# Altium PCB ESP32_DEV.PcbDoc
Units mil, origin at the board's own origin, x right, y up, seen from the top; angles counter-clockwise.
Board outline 1811.02 x 1338.58 mil, 2 copper layers (Top Layer, Bottom Layer); 85 components, 68 nets, 382 pads, 184 vias.
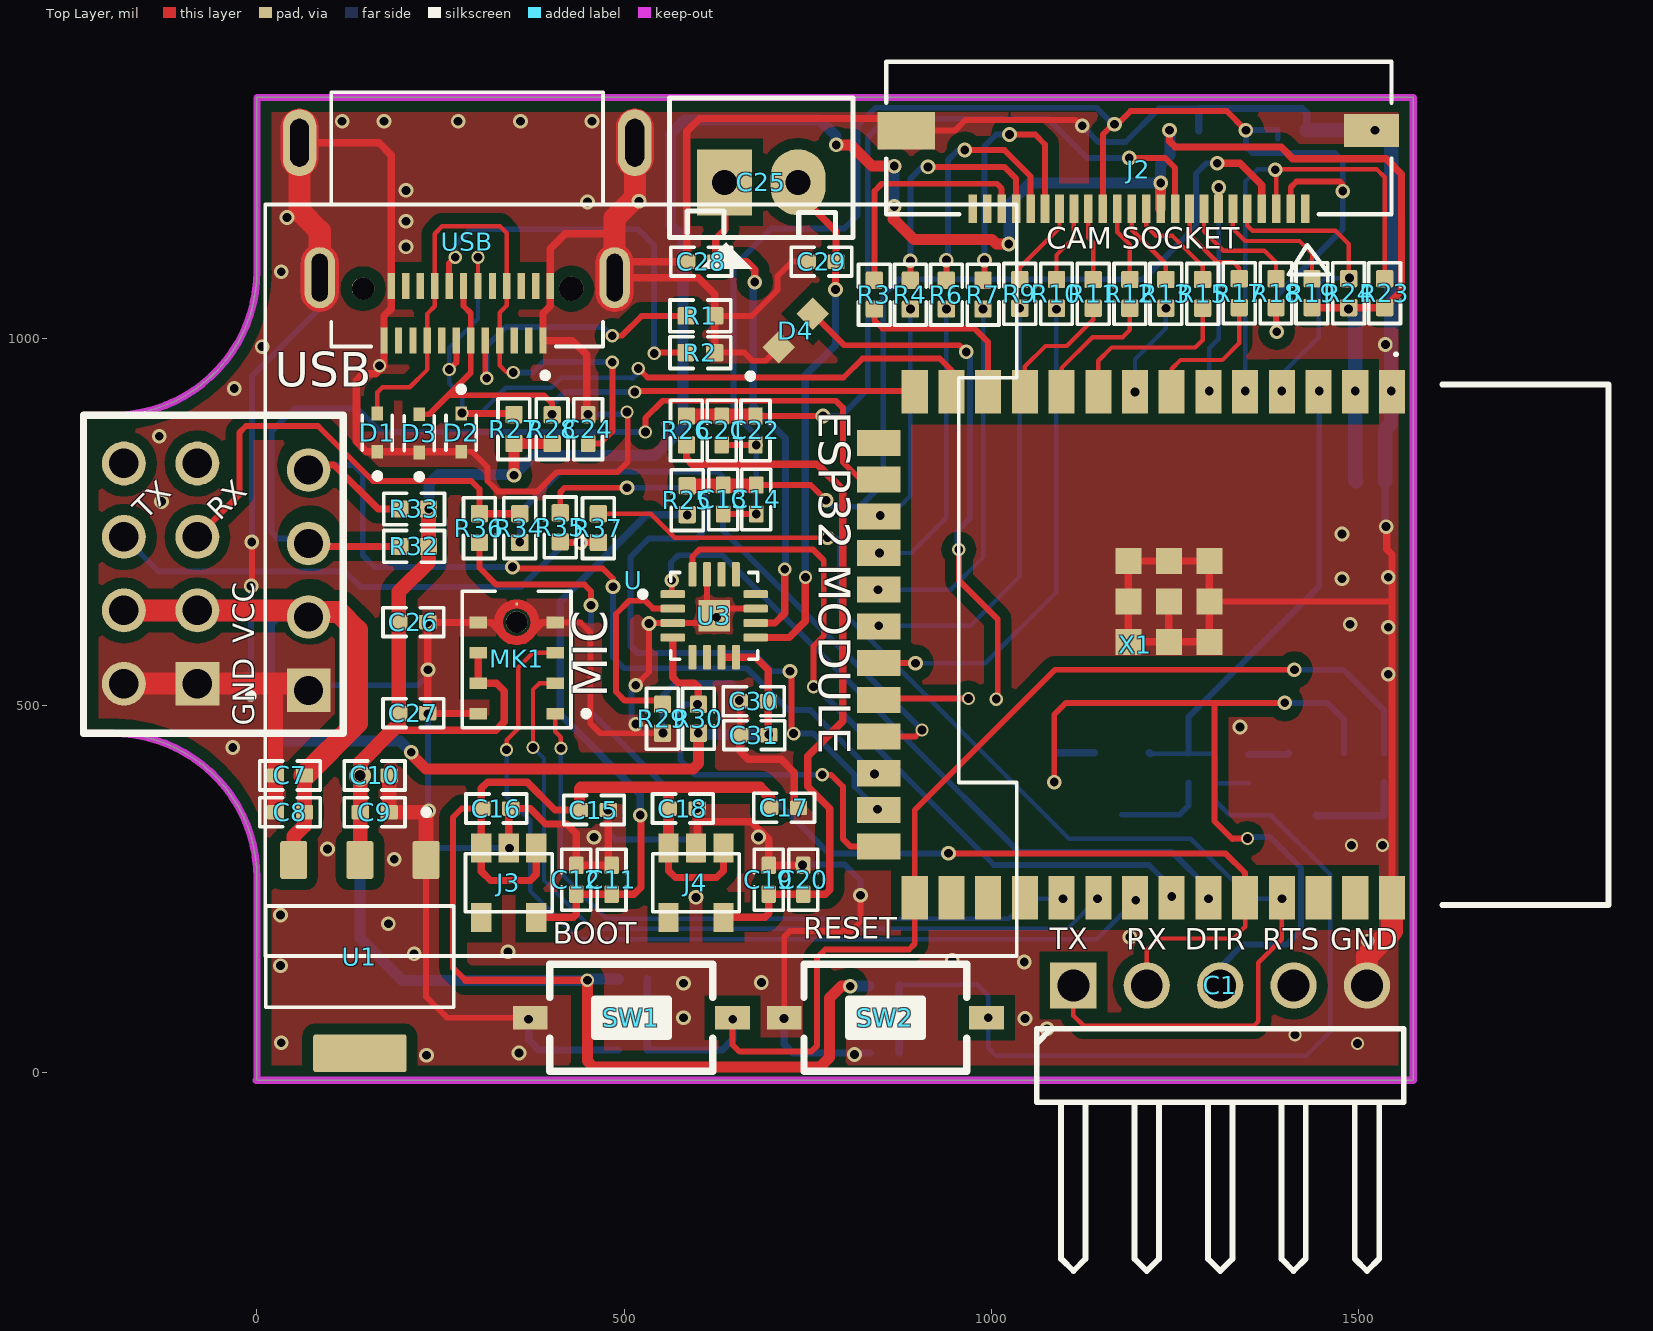
[diagram p0: Top Layer view]
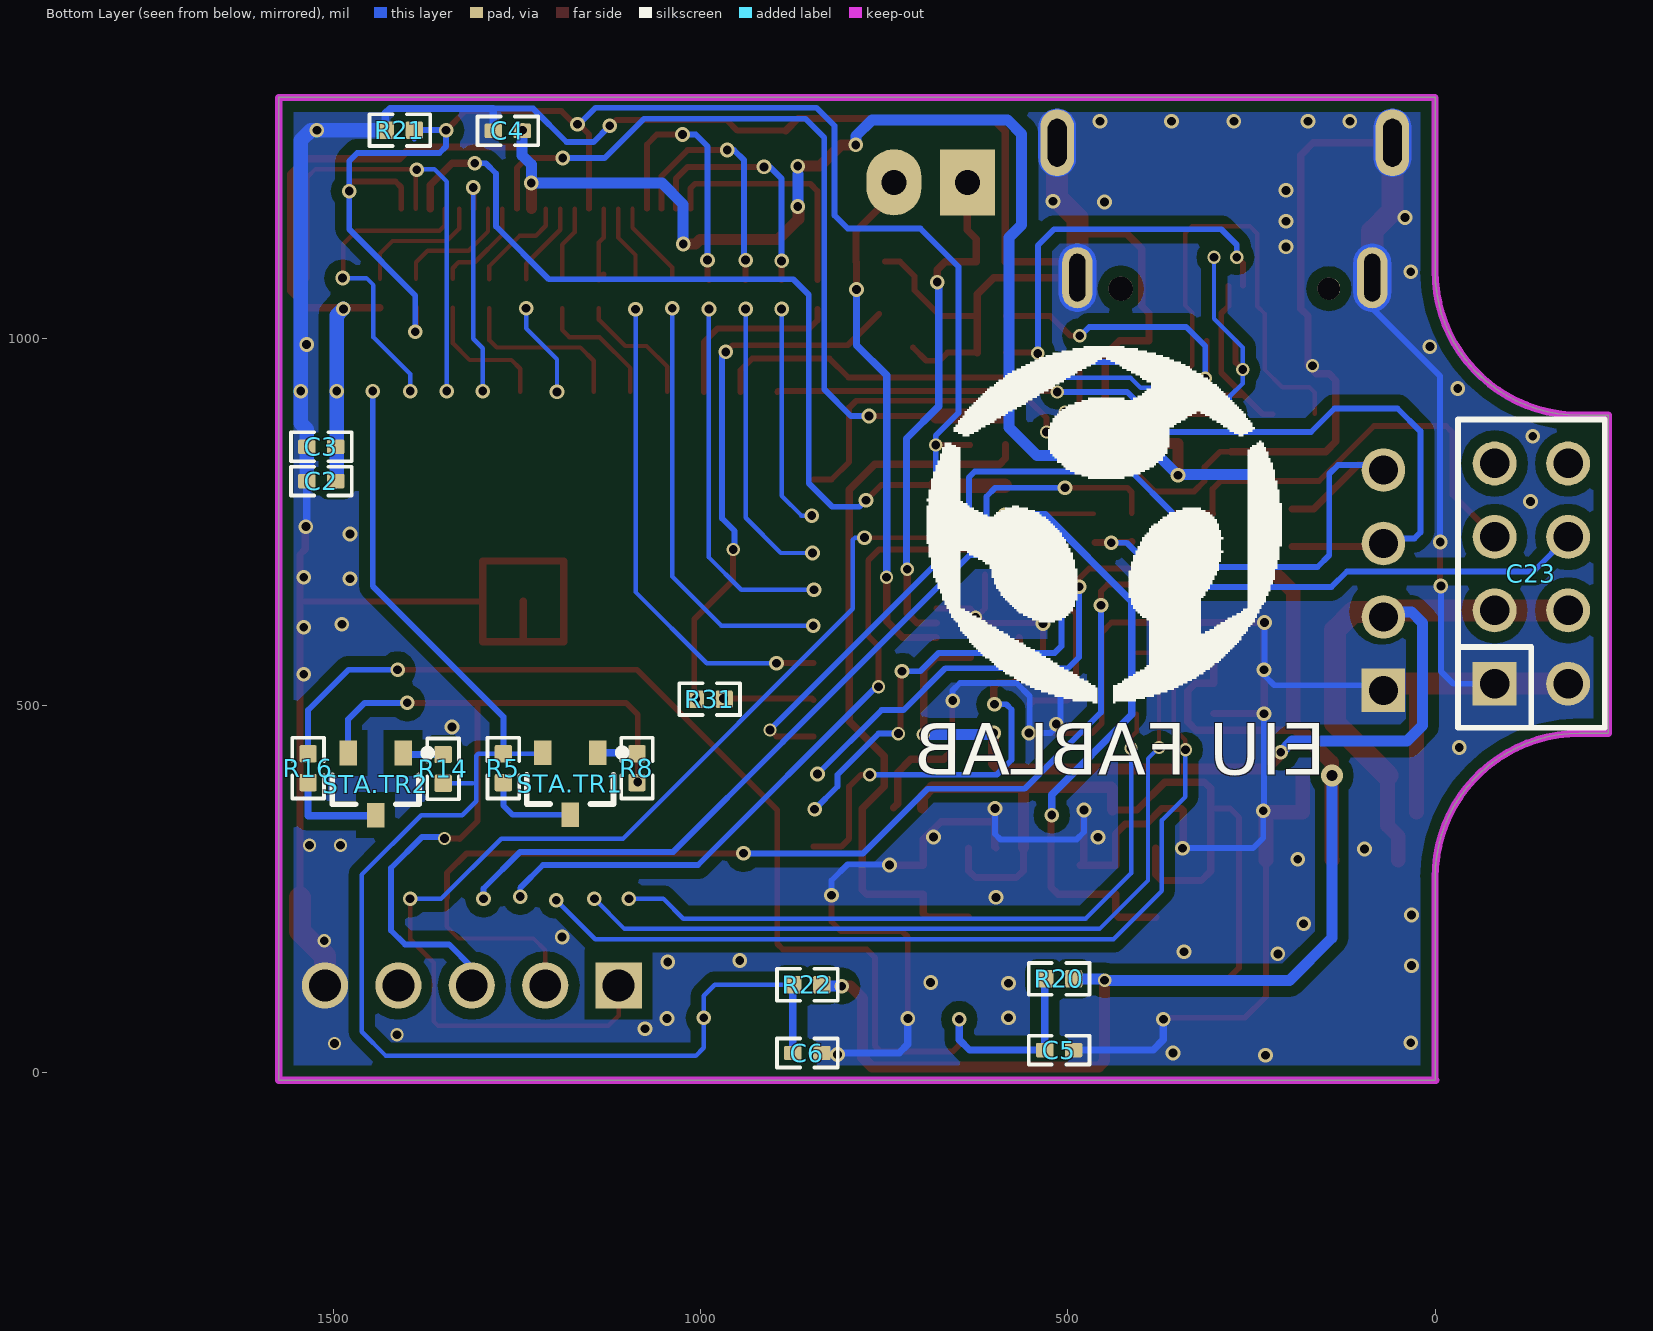
[diagram p1: Bottom Layer view, seen from below]
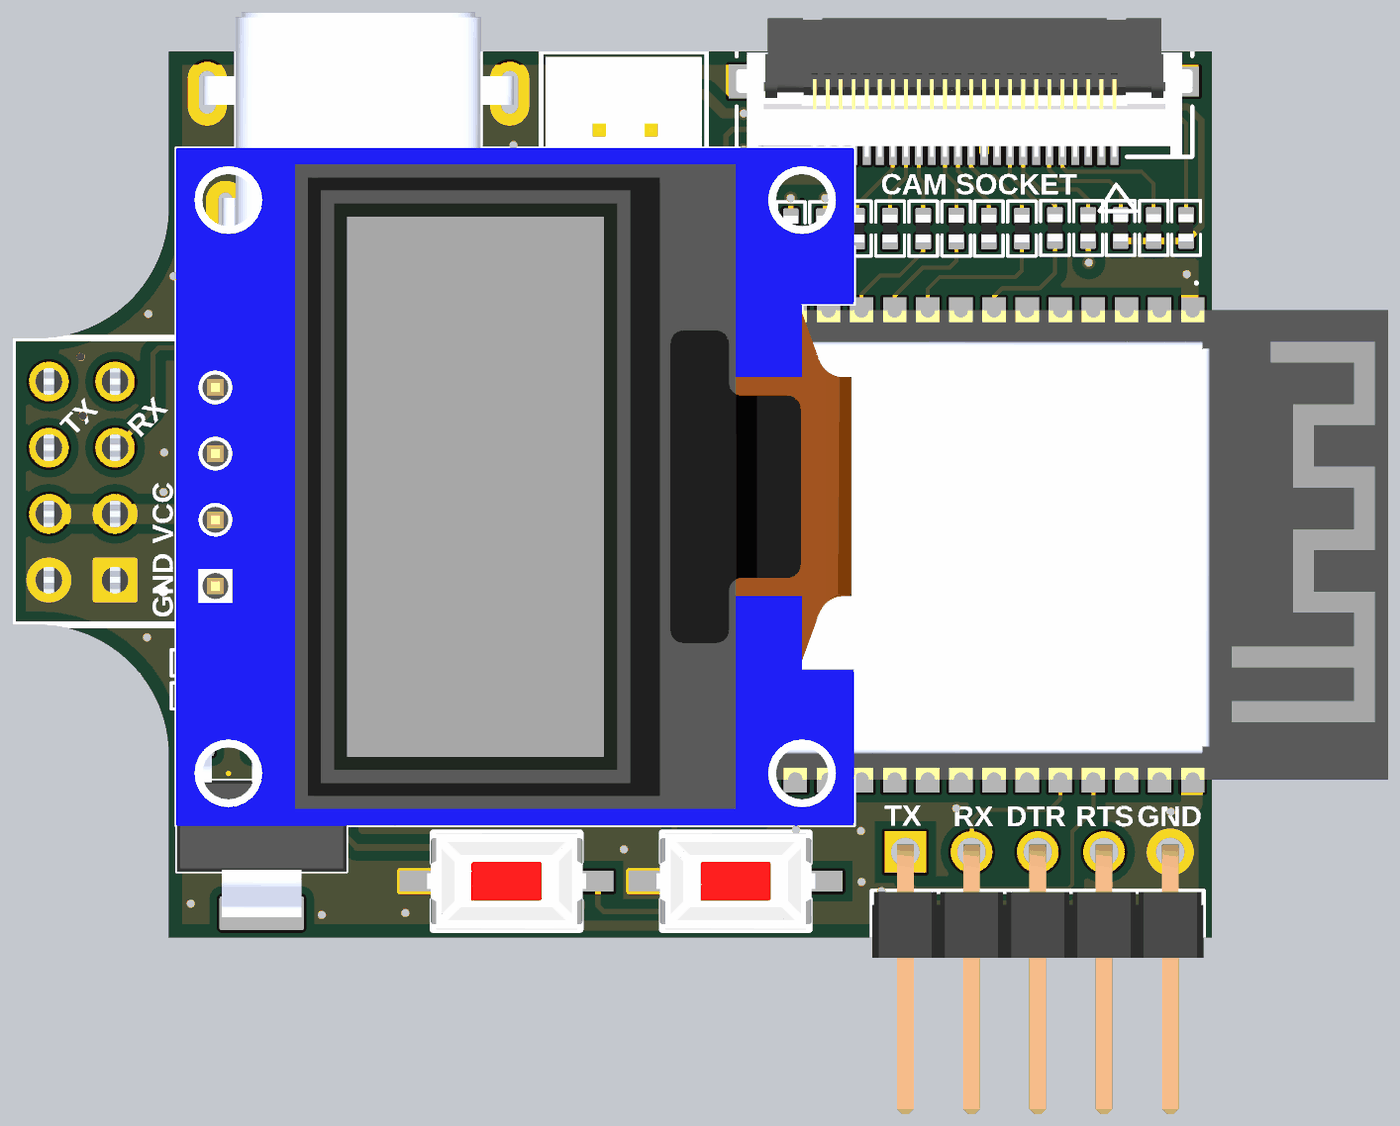
[diagram p2: 3D render of the assembled board from above, using the file's embedded part models]
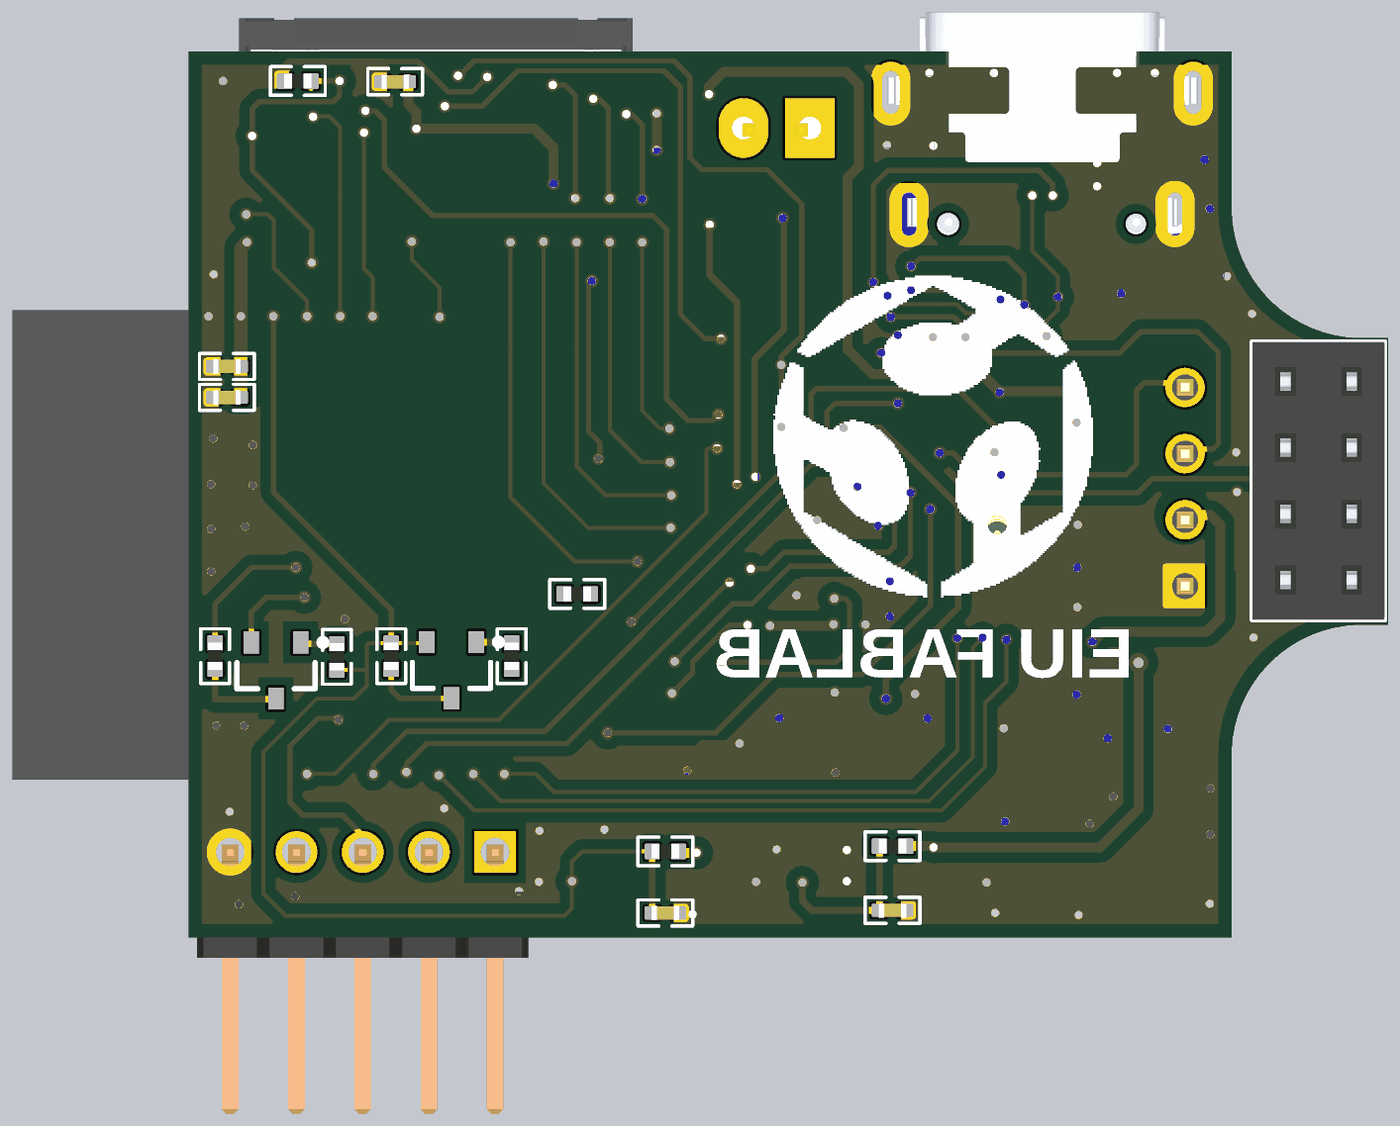
[diagram p3: 3D render of the assembled board from below, using the file's embedded part models]

## Layer stack, top to bottom
Top Solder: solder mask 0.4, Solder Resist, Dk 3.5
Top Layer: signal copper 1.4
Dielectric 1: dielectric 12.6, FR-4, Dk 4.8
Bottom Layer: signal copper 1.4
Bottom Solder: solder mask 0.4, Solder Resist, Dk 3.5

## Board outline
-236.22,462.44 -236.22,895.51 -196.85,895.51 ccw(c-196.85,1092.36) 0,1092.36 0,1328.58 1574.8,1328.58 1574.8,-10 0,-10 0,265.59 ccw(c-196.85,265.59) -196.85,462.44

## Design rules (kind name [scope] priority, off if disabled: settings)
Clearance [All] p1: gap=5 ignorepadtopadclearanceinfootprint=TRUE
PlaneConnect [All] p1: planeconnectstyle=Direct reliefexpansion=20 reliefentries=4 reliefconductorwidth=10 reliefairgap=10
PolygonConnect [All] p1: connectstyle=Direct reliefconductorwidth=10 reliefentries=4 polygonreliefangle="90 Angle" airgapwidth=10
RoutingVias [All] p1: holewidth=12 width=20 viastyle="Through Hole" minholewidth=12 minwidth=20 maxholewidth=12 maxwidth=20
SolderMaskExpansion [All] p1: expansion=4
Width [All] p1: maxlimit=30 minlimit=8 preferedwidth=10
29 further rules are at their usual default settings.

## Components (designator, comment, footprint, x,y, rotation, side; value= is the part's Value field where it differs from the comment)
C1 "JP5" JP5-D1C 1562,19 r0 top
C2 "22uF" CAPC1005X55N 1517,806 r180 bottom
C3 "100nF" CAPC1005X55N 1517,852.68 r180 bottom
C4 "0.1uF" CAPC1005X55N 1263,1283 r180 bottom
C5 "100nF" CAPC1005X55N 512,31 r0 bottom
C6 "100nF" CAPC1005X55N 855,27 r0 bottom
C7 "4.7uF" CAPC1005X55N 45,405 r0 top
C8 "1uF" CAPC1005X55N 45,355 r0 top
C9 "4.7uF" CAPC1005X55N 160.31,355 r180 top
C10 "1uF" CAPC1005X55N 160.31,405 r180 top
C11 "0.1uF" CAPC1005X55N 483,263 r270 top
C12 "10uF" CAPC1005X55N 435,263 r270 top
C13 "4.7uF" CAPC1005X55N 635,781 r90 top
C14 "0.1uF" CAPC1005X55N 680,781 r90 top
C15 "10uF" CAPC1005X55N 459,358 r180 top
C16 "0.1uF" CAPC1005X55N 326,360 r180 top
C17 "10uF" CAPC1005X55N 718,361 r180 top
C18 "0.1uF" CAPC1005X55N 580,360 r180 top
C19 "0.1uF" CAPC1005X55N 697,263 r270 top
C20 "10uF" CAPC1005X55N 744,263 r270 top
C21 "4.7uF" CAPC1005X55N 633,875 r90 top
C22 "0.1uF" CAPC1005X55N 679,875 r90 top
C23 "JP4x2" JP4-C2T -131.22,680 r90 bottom
C24 "22uF" CAPC1005X55N 451,876.8 r270 top
C25 "Header2" Header2 637,1213 r0 top
C26 "100nF" CAPC1005X55N 213,614 r0 top
C27 "10uF" CAPC1005X55N 213,490 r0 top
C28 "220pF" CAPC1005X55N 605,1105 r180 top
C29 "220pF" CAPC1005X55N 769,1105 r0 top
C30 "100nF" CAPC1005X55N 676.63,506 r0 top
C31 "10uF" CAPC1005X55N 677.31,460 r0 top
D1 "LESD5D5.0CT1G" TVS_LESD5D5.0CT1G 164,872 r90 top
D2 "LESD5D5.0CT1G" TVS_LESD5D5.0CT1G 278,872 r270 top
D3 "LESD5D5.0CT1G" TVS_LESD5D5.0CT1G 221,871 r90 top
D4 "KP-1608SURCK" LED_KP-1608SURCK 734,1011 r45 top
J2 "5051102491" CON_5051102491_MOL 1201.36,1273.46 r180 top
J3 "ME6211C28M5G-N-2.8V" SOT25 341,255 r180 top
J4 "ME6211C15M5G-N-1.5v" SOT25 596,255 r180 top
MK1 "INMP441ACEZ-R7" MIC_INMP441ACEZ-R7 353.78,563 r270 top
R1 "Thick Film" RESC1005X40N 604,1031 r180 top value=5.1K
R2 "Thick Film" RESC1005X40N 604,981 r180 top value=5.1K
R3 "Thick Film" RESC1005X40N 841,1060 r90 top value=100
R4 "Thick Film" RESC1005X40N 890,1060 r90 top value=100
R5 "Thick Film" RESC1005X40N 1269,415 r270 bottom value=10K
R6 "Thick Film" RESC1005X40N 939,1060 r90 top value=100
R7 "Thick Film" RESC1005X40N 989,1060 r90 top value=100
R8 "Thick Film" RESC1005X40N 1087,415 r270 bottom value=10K
R9 "Thick Film" RESC1005X40N 1039,1061 r90 top value=100
R10 "Thick Film" RESC1005X40N 1089,1061 r90 top value=100
R11 "Thick Film" RESC1005X40N 1139,1061 r90 top value=100
R12 "Thick Film" RESC1005X40N 1189,1061 r90 top value=100
R13 "Thick Film" RESC1005X40N 1238,1061 r90 top value=100
R14 "Thick Film" RESC1005X40N 1351,414 r270 bottom value=10K
R15 "Thick Film" RESC1005X40N 1288,1061 r90 top value=100
R16 "Thick Film" RESC1005X40N 1535,415 r270 bottom value=10K
R17 "Thick Film" RESC1005X40N 1338,1062 r90 top value=100
R18 "Thick Film" RESC1005X40N 1388,1062 r90 top value=100K
R19 "Thick Film" RESC1005X40N 1437,1062 r90 top value=10K
R20 "Thick Film" RESC1005X40N 512,128 r0 bottom value=120
R21 "Thick Film" RESC1005X40N 1410,1284 r0 bottom value=0
R22 "Thick Film" RESC1005X40N 855,120 r0 bottom value=120
R23 "Thick Film" RESC1005X40N 1536,1062 r270 top value=4.7K
R24 "Thick Film" RESC1005X40N 1487,1062 r270 top value=4.7K
R25 "Thick Film" RESC1005X40N 586,780 r270 top value=0
R26 "Thick Film" RESC1005X40N 585,875 r270 top value=0
R27 "Thick Film" RESC1005X40N 350,876.8 r90 top value=10K
R28 "Thick Film" RESC1005X40N 402,876.8 r270 top value=10K
R29 "Thick Film" RESC1005X40N 552.31,482.32 r270 top value=10K
R30 "Thick Film" RESC1005X40N 601.31,482.32 r270 top value=10K
R31 "Thick Film" RESC1005X40N 988,509 r180 bottom value=1K
R32 "Thick Film" RESC1005X40N 214,717 r180 top value=4.7K
R33 "Thick Film" RESC1005X40N 214,768 r0 top value=4.7K
R34 "Thick Film" RESC1005X40N 358,742 r270 top value=0
R35 "Thick Film" RESC1005X40N 413,743 r90 top value=0
R36 "Thick Film" RESC1005X40N 303,742 r270 top value=0
R37 "Thick Film" RESC1005X40N 465,742 r90 top value=0
STA.TR1 "TR815" SOT-23B_L 1178,393.88 r270 bottom value=C1815
STA.TR2 "TR815" SOT-23B_L 1443,393.32 r270 bottom value=C1815
SW1 "BOOT" SW1-SMD 510,75 r180 top value="SW chip 2 pin"
SW2 "RESET" SW1-SMD 856,75 r180 top value="SW chip 2 pin"
U "DM-OLED096-636" MODULE_DM-OLED096-636 523,671 r90 top
U1 "AMS1117-3.3" SOT229P700X180-4N 140.16,158.31 r270 top
U3 "MAX98357AETE+T" QFN50P300X300X80-17N 622.84,622.5 r0 top
USB "2388749-1" TE_2388749-1 286.29,1068.06 r180 top
X1 "ESP32-S3-WROOM-1-N16R8" ESP32S3WROOM1N8R2 1338.85,583.06 r270 top

## Footprints (in the part's own frame and the unit in brackets; to place one, negate y for a bottom-side part, rotate by r counter-clockwise, add the part's x,y. Pads: shape width x height; smd on the part's side, far side on the other; paste and mask are expansions set on the pad)
CAPC1005X55N [mm] "Chip Capacitor, Body 1.0x0.5mm, EIA 0402, IPC Medium Density"
  round 0.2 on Mech15: 0(0,0)
  rrect20% 0.6x0.5 smd: 1(-0.5,0) 2(0.5,0)
  Top Layer pour cut-out: -0.325,0.375 -0.2,0.5 0.2,0.5 0.325,0.375 0.325,-0.375 0.2,-0.5 -0.2,-0.5 -0.325,-0.375
  silkscreen extent -1.05,-0.5 1.05,0.5, body extent -0.52,-0.27 0.53,0.28, height 0.55
CON_5051102491_MOL [mm]
  rect 0.3x1 smd: 1(-5.75,2.45) 2(-5.25,2.45) 3(-4.75,2.45) 4(-4.25,2.45) 5(-3.75,2.45) 6(-3.25,2.45) 7(-2.75,2.45) 8(-2.25,2.45) 9(-1.75,2.45) 10(-1.25,2.45) 11(-0.75,2.45) 12(-0.25,2.45) 13(0.25,2.45) 14(0.75,2.45) 15(1.25,2.45) 16(1.75,2.45) 17(2.25,2.45) 18(2.75,2.45) 19(3.25,2.45) 20(3.75,2.45) 21(4.25,2.45) 22(4.75,2.45) 23(5.25,2.45) 24(5.75,2.45)
  rect 1.905x1.143 smd: P1(-8.05,-0.25)
  rect 2x1.3 smd: P2(8.05,-0.25)
  silkscreen extent -8.74,-2.64 8.74,4.72, body extent -8.75,-2.67 8.75,2.63, height 2.1
ESP32S3WROOM1N8R2 [mm]
  rect 1.5x0.9 smd: 1(-8.75,5.26) 2(-8.75,3.99) 3(-8.75,2.72) 4(-8.75,1.45) 5(-8.75,0.18) 6(-8.75,-1.09) 7(-8.75,-2.36) 8(-8.75,-3.63) 9(-8.75,-4.9) 10(-8.75,-6.17) 11(-8.75,-7.44) 12(-8.75,-8.71) 13(-8.75,-9.98) 14(-8.75,-11.25) 27(8.75,-11.25) 28(8.75,-9.98) 29(8.75,-8.71) 30(8.75,-7.44) 31(8.75,-6.17) 32(8.75,-4.9) 33(8.75,-3.63) 34(8.75,-2.36) 35(8.75,-1.09) 36(8.75,0.18) 37(8.75,1.45) 38(8.75,2.72) 39(8.75,3.99) 40(8.75,5.26)
  rect 0.9x1.5 smd: 15(-6.985,-12.5) 16(-5.715,-12.5) 17(-4.445,-12.5) 18(-3.175,-12.5) 19(-1.905,-12.5) 20(-0.635,-12.5) 21(0.635,-12.5) 22(1.905,-12.5) 23(3.175,-12.5) 24(4.445,-12.5) 25(5.715,-12.5) 26(6.985,-12.5)
  rect 0.9x0.9 smd: 41(-1.5,-2.46) 42(-1.5,-1.06) 43(-2.9,-1.06) 44(-2.9,-2.46) 45(-2.9,-3.86) 46(-1.5,-3.86) 47(-0.1,-3.86) 48(-0.1,-2.46) 49(-0.1,-1.06)
  silkscreen extent -10.1,5.35 9,12.75, body extent -9,-12.75 9,12.75, height 3.25
Header2 [mil] "CON2"
  rect 75x90 hole 34: 1(0,0)
  oval 75x90 hole 34: 2(100,0)
  silkscreen extent -75,-118 175,115, body extent -68,-70 168,107, height 236
JP4-C2T [mm] "8 pins, dual row, straight, gold plating"
  rect 1.52x1.52 hole 1.02: 1(-3.81,1.27)
  round 1.52 hole 1.02: 2(-1.27,1.27) 3(1.27,1.27) 4(3.81,1.27) 5(3.81,-1.27) 6(1.27,-1.27) 7(-1.27,-1.27) 8(-3.81,-1.27)
  silkscreen extent -5.33,-2.54 5.33,2.54, body extent -5.33,-2.54 5.33,2.54, height 8.51
JP5-D1C [mm] "5 pins, 1 row, right angled, gold plating"
  rect 1.6x1.6 hole 1.1: 1(-11.43,2.54)
  round 1.6 hole 1.1: 2(-8.89,2.54) 3(-6.35,2.54) 4(-3.81,2.54) 5(-1.27,2.54)
  silkscreen extent -12.7,-7.34 0,1.04, body extent -12.7,-7.52 0,2.84, height 2.55
LED_KP-1608SURCK [mm]
  rect 0.8x0.8 smd: 1(0.825,0) 2(-0.825,0)
  silkscreen extent -2.32,-0.1 -2.13,0.1, body extent -0.8,-0.4 0.8,0.4, height 1.1
MIC_INMP441ACEZ-R7 [mm]
  rect 0.4x0.6 smd paste-0.025: 1(1.87,1.33) 2(0.82,1.33) 3(-0.23,1.33) 4(-1.28,1.33) 6(-1.28,-1.33) 7(-0.23,-1.33) 8(0.82,-1.33) 9(1.87,-1.33)
  rect 0.1x0.1 smd paste-1 mask+0: 5(-1.92,0)
  round 0.75 hole 0.75 unplated mask+0.505: ""(-1.29,0)
  Top Layer region: 244 vertices and 0 holes, not listed, extent -2.07,-0.78 -0.51,0.78
  silkscreen extent -2.36,-1.88 2.36,2.5, body extent -2.36,-1.88 2.36,1.88, height 1.05
MODULE_DM-OLED096-636 [mm]
  rect 1.508x1.508 / inner round 1.508 / far side rect 1.508x1.508 hole 1: 1(-3.81,11.5)
  round 1.508 hole 1: 2(-1.27,11.5) 3(1.27,11.5) 4(3.81,11.5)
  round 0 smd: S1(-11,11) S2(11,11) S3(11,-11) S4(-11,-11)
  silkscreen extent -13,-13 13,13.6, body extent -13,-13 13,13, height 8.96
QFN50P300X300X80-17N [mm]
  rrect25% 0.84x0.27 smd: 1(-1.435,0.75) 2(-1.435,0.25) 3(-1.435,-0.25) 4(-1.435,-0.75) 9(1.435,-0.75) 10(1.435,-0.25) 11(1.435,0.25) 12(1.435,0.75)
  rrect25% 0.27x0.84 smd: 5(-0.75,-1.435) 6(-0.25,-1.435) 7(0.25,-1.435) 8(0.75,-1.435) 13(0.75,1.435) 14(0.25,1.435) 15(-0.25,1.435) 16(-0.75,1.435)
  rect 1.1x1.1 smd paste-0.2: 17(0,0)
  silkscreen extent -2.57,-1.5 1.5,1.5, body extent -1.5,-1.5 1.5,1.5, height 0.9
RESC1005X40N [mm] "Chip Resistor, Body 1.0x0.5mm, EIA 0402, IPC Medium Density"
  round 0.2 on Mech15: 0(0,0)
  rrect20% 0.6x0.6 smd: 1(-0.5,0) 2(0.5,0)
  Top Layer pour cut-out: -0.325,0.375 -0.2,0.5 0.2,0.5 0.325,0.375 0.325,-0.375 0.2,-0.5 -0.2,-0.5 -0.325,-0.375
  silkscreen extent -1.05,-0.55 1.05,0.55, body extent -0.52,-0.27 0.53,0.28, height 0.4
SOT25 [mm]
  rect 0.7x1 smd: P$1(-1,-1.3) P$2(-0.05,-1.3) P$3(0.9,-1.3) P$4(-1,1.1) P$5(0.9,1.1)
  silkscreen extent -1.55,-1.1 1.45,0.9, body extent -1.45,-1.4 1.45,1.4, height 1.3
SOT229P700X180-4N [mm]
  rrect15% 1.31x0.93 smd: 1(-3.345,2.29) 2(-3.345,0) 3(-3.345,-2.29)
  rrect15% 1.31x3.24 smd: 4(3.345,0)
  silkscreen extent -5.1,-3.25 1.75,3.25, body extent -3.5,-3.25 3.5,3.25, height 1.8
SOT-23B_L [mm] "SOT23, 3-Leads, Body 2.9x1.3mm, Pitch 0.95mm, Lead Span 2.4mm, IPC High Density"
  rect 0.85x0.6 smd: 1(-1.075,-0.95) 2(1.075,0) 3(-1.075,0.95)
  silkscreen extent -1.2,-1.5 0.7,1.92, body extent -0.7,-1.5 0.7,1.5, height 1.14
SW1-SMD [mm]
  rect 1.2x0.8 smd: 1(-3.5,0) 2(3.5,0)
  silkscreen extent -2.82,-1.85 2.82,1.85, body extent -3.05,-1.85 3.05,1.85, height 2.5
TE_2388749-1 [mm]
  rect 0.254x0.9 smd: A1(-2.625,1.8) A2(-2.125,1.8) A3(-1.625,1.8) A4(-1.125,1.8) A5(-0.625,1.8) A6(-0.125,1.8) A7(0.375,1.8) A8(0.875,1.8) A9(1.375,1.8) A10(1.875,1.8) A11(2.375,1.8) A12(2.875,1.8) B1(2.625,-0.1) B2(2.125,-0.1) B3(1.625,-0.1) B4(1.125,-0.1) B5(0.625,-0.1) B6(0.125,-0.1) B7(-0.375,-0.1) B8(-0.875,-0.1) B9(-1.375,-0.1) B10(-1.875,-0.1) B11(-2.375,-0.1) B12(-2.875,-0.1)
  oval 1.058x2.116 hole 0.55 slot 1.65 at 90 deg mask+0: S1(-5.1,-0.38) S2(5.1,-0.38)
  oval 1.158x2.316 hole 0.65 slot 1.65 at 90 deg mask+0: S3(-5.8,-5.05) S4(5.8,-5.05)
  round 0.84 hole 0.84 unplated: ""(-3.6,0)
  round 0.78 hole 0.78 unplated: ""(3.6,0)
  Top Layer region: 5.868,-3.879 5.935,-3.889 6.001,-3.907 6.064,-3.931 6.125,-3.962 6.182,-3.999 6.235,-4.042 6.283,-4.09 6.326,-4.143 6.363,-4.2 6.394,-4.261 6.418,-4.324 6.436,-4.39 6.446,-4.457 6.45,-4.525 6.45,-5.575 6.446,-5.643 6.436,-5.71 6.418,-5.776 6.394,-5.839 6.363,-5.9 6.326,-5.957 6.283,-6.01 6.235,-6.058 6.182,-6.101 6.125,-6.138 6.064,-6.169 6.001,-6.193 5.935,-6.211 5.868,-6.221 5.8,-6.225 5.732,-6.221 5.665,-6.211 5.599,-6.193 5.536,-6.169 5.475,-6.138 5.418,-6.101 5.365,-6.058 5.317,-6.01 5.274,-5.957 5.237,-5.9 5.206,-5.839 5.182,-5.776 5.164,-5.71 5.154,-5.643 5.15,-5.575 5.15,-4.525 5.154,-4.457 5.164,-4.39 5.182,-4.324 5.206,-4.261 5.237,-4.2 5.274,-4.143 5.317,-4.09 5.365,-4.042 5.418,-3.999 5.475,-3.962 5.536,-3.931 5.599,-3.907 5.665,-3.889 5.732,-3.879 5.8,-3.875
  Top Layer region: -5.732,-3.879 -5.665,-3.889 -5.599,-3.907 -5.536,-3.931 -5.475,-3.962 -5.418,-3.999 -5.365,-4.042 -5.317,-4.09 -5.274,-4.143 -5.237,-4.2 -5.206,-4.261 -5.182,-4.324 -5.164,-4.39 -5.154,-4.457 -5.15,-4.525 -5.15,-5.575 -5.154,-5.643 -5.164,-5.71 -5.182,-5.776 -5.206,-5.839 -5.237,-5.9 -5.274,-5.957 -5.317,-6.01 -5.365,-6.058 -5.418,-6.101 -5.475,-6.138 -5.536,-6.169 -5.599,-6.193 -5.665,-6.211 -5.732,-6.221 -5.8,-6.225 -5.868,-6.221 -5.935,-6.211 -6.001,-6.193 -6.064,-6.169 -6.125,-6.138 -6.182,-6.101 -6.235,-6.058 -6.283,-6.01 -6.326,-5.957 -6.363,-5.9 -6.394,-5.839 -6.418,-5.776 -6.436,-5.71 -6.446,-5.643 -6.45,-5.575 -6.45,-4.525 -6.446,-4.457 -6.436,-4.39 -6.418,-4.324 -6.394,-4.261 -6.363,-4.2 -6.326,-4.143 -6.283,-4.09 -6.235,-4.042 -6.182,-3.999 -6.125,-3.962 -6.064,-3.931 -6.001,-3.907 -5.935,-3.889 -5.868,-3.879 -5.8,-3.875
  Top Layer region: 5.168,0.791 5.235,0.781 5.301,0.763 5.364,0.739 5.425,0.708 5.482,0.671 5.535,0.628 5.583,0.58 5.626,0.527 5.663,0.47 5.694,0.409 5.718,0.346 5.736,0.28 5.746,0.213 5.75,0.145 5.75,-0.905 5.746,-0.973 5.736,-1.04 5.718,-1.106 5.694,-1.169 5.663,-1.23 5.626,-1.287 5.583,-1.34 5.535,-1.388 5.482,-1.431 5.425,-1.468 5.364,-1.499 5.301,-1.523 5.235,-1.541 5.168,-1.551 5.1,-1.555 5.032,-1.551 4.965,-1.541 4.899,-1.523 4.836,-1.499 4.775,-1.468 4.718,-1.431 4.665,-1.388 4.617,-1.34 4.574,-1.287 4.537,-1.23 4.506,-1.169 4.482,-1.106 4.464,-1.04 4.454,-0.973 4.45,-0.905 4.45,0.145 4.454,0.213 4.464,0.28 4.482,0.346 4.506,0.409 4.537,0.47 4.574,0.527 4.617,0.58 4.665,0.628 4.718,0.671 4.775,0.708 4.836,0.739 4.899,0.763 4.965,0.781 5.032,0.791 5.1,0.795
  Top Layer region: -5.032,0.791 -4.965,0.781 -4.899,0.763 -4.836,0.739 -4.775,0.708 -4.718,0.671 -4.665,0.628 -4.617,0.58 -4.574,0.527 -4.537,0.47 -4.506,0.409 -4.482,0.346 -4.464,0.28 -4.454,0.213 -4.45,0.145 -4.45,-0.905 -4.454,-0.973 -4.464,-1.04 -4.482,-1.106 -4.506,-1.169 -4.537,-1.23 -4.574,-1.287 -4.617,-1.34 -4.665,-1.388 -4.718,-1.431 -4.775,-1.468 -4.836,-1.499 -4.899,-1.523 -4.965,-1.541 -5.032,-1.551 -5.1,-1.555 -5.168,-1.551 -5.235,-1.541 -5.301,-1.523 -5.364,-1.499 -5.425,-1.468 -5.482,-1.431 -5.535,-1.388 -5.583,-1.34 -5.626,-1.287 -5.663,-1.23 -5.694,-1.169 -5.718,-1.106 -5.736,-1.04 -5.746,-0.973 -5.75,-0.905 -5.75,0.145 -5.746,0.213 -5.736,0.28 -5.718,0.346 -5.694,0.409 -5.663,0.47 -5.626,0.527 -5.583,0.58 -5.535,0.628 -5.482,0.671 -5.425,0.708 -5.364,0.739 -5.301,0.763 -5.235,0.781 -5.168,0.791 -5.1,0.795
  Bottom Layer region: 5.868,-3.879 5.935,-3.889 6.001,-3.907 6.064,-3.931 6.125,-3.962 6.182,-3.999 6.235,-4.042 6.283,-4.09 6.326,-4.143 6.363,-4.2 6.394,-4.261 6.418,-4.324 6.436,-4.39 6.446,-4.457 6.45,-4.525 6.45,-5.575 6.446,-5.643 6.436,-5.71 6.418,-5.776 6.394,-5.839 6.363,-5.9 6.326,-5.957 6.283,-6.01 6.235,-6.058 6.182,-6.101 6.125,-6.138 6.064,-6.169 6.001,-6.193 5.935,-6.211 5.868,-6.221 5.8,-6.225 5.732,-6.221 5.665,-6.211 5.599,-6.193 5.536,-6.169 5.475,-6.138 5.418,-6.101 5.365,-6.058 5.317,-6.01 5.274,-5.957 5.237,-5.9 5.206,-5.839 5.182,-5.776 5.164,-5.71 5.154,-5.643 5.15,-5.575 5.15,-4.525 5.154,-4.457 5.164,-4.39 5.182,-4.324 5.206,-4.261 5.237,-4.2 5.274,-4.143 5.317,-4.09 5.365,-4.042 5.418,-3.999 5.475,-3.962 5.536,-3.931 5.599,-3.907 5.665,-3.889 5.732,-3.879 5.8,-3.875
  Bottom Layer region: -5.732,-3.879 -5.665,-3.889 -5.599,-3.907 -5.536,-3.931 -5.475,-3.962 -5.418,-3.999 -5.365,-4.042 -5.317,-4.09 -5.274,-4.143 -5.237,-4.2 -5.206,-4.261 -5.182,-4.324 -5.164,-4.39 -5.154,-4.457 -5.15,-4.525 -5.15,-5.575 -5.154,-5.643 -5.164,-5.71 -5.182,-5.776 -5.206,-5.839 -5.237,-5.9 -5.274,-5.957 -5.317,-6.01 -5.365,-6.058 -5.418,-6.101 -5.475,-6.138 -5.536,-6.169 -5.599,-6.193 -5.665,-6.211 -5.732,-6.221 -5.8,-6.225 -5.868,-6.221 -5.935,-6.211 -6.001,-6.193 -6.064,-6.169 -6.125,-6.138 -6.182,-6.101 -6.235,-6.058 -6.283,-6.01 -6.326,-5.957 -6.363,-5.9 -6.394,-5.839 -6.418,-5.776 -6.436,-5.71 -6.446,-5.643 -6.45,-5.575 -6.45,-4.525 -6.446,-4.457 -6.436,-4.39 -6.418,-4.324 -6.394,-4.261 -6.363,-4.2 -6.326,-4.143 -6.283,-4.09 -6.235,-4.042 -6.182,-3.999 -6.125,-3.962 -6.064,-3.931 -6.001,-3.907 -5.935,-3.889 -5.868,-3.879 -5.8,-3.875
  Bottom Layer region: -5.032,0.791 -4.965,0.781 -4.899,0.763 -4.836,0.739 -4.775,0.708 -4.718,0.671 -4.665,0.628 -4.617,0.58 -4.574,0.527 -4.537,0.47 -4.506,0.409 -4.482,0.346 -4.464,0.28 -4.454,0.213 -4.45,0.145 -4.45,-0.905 -4.454,-0.973 -4.464,-1.04 -4.482,-1.106 -4.506,-1.169 -4.537,-1.23 -4.574,-1.287 -4.617,-1.34 -4.665,-1.388 -4.718,-1.431 -4.775,-1.468 -4.836,-1.499 -4.899,-1.523 -4.965,-1.541 -5.032,-1.551 -5.1,-1.555 -5.168,-1.551 -5.235,-1.541 -5.301,-1.523 -5.364,-1.499 -5.425,-1.468 -5.482,-1.431 -5.535,-1.388 -5.583,-1.34 -5.626,-1.287 -5.663,-1.23 -5.694,-1.169 -5.718,-1.106 -5.736,-1.04 -5.746,-0.973 -5.75,-0.905 -5.75,0.145 -5.746,0.213 -5.736,0.28 -5.718,0.346 -5.694,0.409 -5.663,0.47 -5.626,0.527 -5.583,0.58 -5.535,0.628 -5.482,0.671 -5.425,0.708 -5.364,0.739 -5.301,0.763 -5.235,0.781 -5.168,0.791 -5.1,0.795
  Bottom Layer region: 5.168,0.791 5.235,0.781 5.301,0.763 5.364,0.739 5.425,0.708 5.482,0.671 5.535,0.628 5.583,0.58 5.626,0.527 5.663,0.47 5.694,0.409 5.718,0.346 5.736,0.28 5.746,0.213 5.75,0.145 5.75,-0.905 5.746,-0.973 5.736,-1.04 5.718,-1.106 5.694,-1.169 5.663,-1.23 5.626,-1.287 5.583,-1.34 5.535,-1.388 5.482,-1.431 5.425,-1.468 5.364,-1.499 5.301,-1.523 5.235,-1.541 5.168,-1.551 5.1,-1.555 5.032,-1.551 4.965,-1.541 4.899,-1.523 4.836,-1.499 4.775,-1.468 4.718,-1.431 4.665,-1.388 4.617,-1.34 4.574,-1.287 4.537,-1.23 4.506,-1.169 4.482,-1.106 4.464,-1.04 4.454,-0.973 4.45,-0.905 4.45,0.145 4.454,0.213 4.464,0.28 4.482,0.346 4.506,0.409 4.537,0.47 4.574,0.527 4.617,0.58 4.665,0.628 4.718,0.671 4.775,0.708 4.836,0.739 4.899,0.763 4.965,0.781 5.032,0.791 5.1,0.795
  silkscreen extent -4.7,-6.8 4.7,3.1, body extent -5.93,-8.12 5.97,2.02, height 2.85
TVS_LESD5D5.0CT1G [mm]
  rect 0.48x0.4 smd: 1(-0.66,0) 2(0.66,0)
  silkscreen extent -1.6,-0.52 0.6,0.52, body extent -0.8,-0.4 0.8,0.4, height 0.7

## Part data
C1: "WR-PHD 2.54 mm Angled Socket Header", Manufacturer="W¨¹rth Elektronik eiSos GmbH", partNo=613005143121, ComponentLink1 Description=Manufacturer, ComponentLink1URL=http://www.we-online.com, ComponentLink2 Description=Datasheet, ComponentLink2URL=http://katalog.we-online.de/em/datasheet/6130xx143121.pdf, Created by="Karrer Zheng", Created Date="29 March 2013", NoPins=05
C2 C3 C4 C5 C6 C7 C8 C9 C10 C11 C12 C13 C14 C15 C16 C17 C18 C19 C20 C21 C22 C24 C26 C27 C28 C29 C30 C31: library part "CAP C_0402", "Capacitor SMD Cer 1nF 10% 16V X7R 0402", Manufacturer 1="AVX Corporation", Manufacturer 2=Yageo, Manufacturer Part Number 1=0402YC102KAT2A, Manufacturer Part Number 2=CC0402KRX7R7BB102, Operating Temperature="-55°C ~ 125°C", Package / Case="0402 (1005 Metric)", Ratings="16V; X7R", Supplier Part Number 1=478-6197-1-ND, Tolerance=±10%, ComponentLink1Description=http://www.avx.com/docs/Catalogs/cx7r.pdf, ComponentLink1URL=http://www.avx.com/docs/Catalogs/cx7r.pdf, ComponentLink2Description=http://www.yageo.com/documents/recent/UPY-GPHC_X7R_6.3V-to-50V_8.pdf, ComponentLink2URL=http://www.yageo.com/documents/recent/UPY-GPHC_X7R_6.3V-to-50V_8.pdf, SCDType=spec, Size / Dimension="0.039\" L x 0.020\" W (1.00mm x 0.50mm)", Supplier 1=Digi-Key, Supplier 2=Digi-Key, Supplier Part Number 2=311-1352-1-ND
C23: "WR-PHD 2.54 mm Dual Socket Header", Manufacturer="W¨¹rth Elektronik eiSos GmbH", partNo=61300821821, ComponentLink1 Description=Manufacturer, ComponentLink1URL=http://www.we-online.com, ComponentLink2 Description=Datasheet, ComponentLink2URL=http://katalog.we-online.de/em/datasheet/6130xx21821.pdf, Created by="Karrer Zheng", Created Date="29 March 2013", NoPins=08
C25: "Header IDC, 2 x 1 Pin Vertical 2.54mm Pitch (Non-Boxed, Male)", Manufacturer="W¨¹rth Elektronik eiSos GmbH", partNo=613002143121, ComponentLink1 Description=Manufacturer, ComponentLink1URL=http://www.we-online.com, ComponentLink2 Description=Datasheet, ComponentLink2URL=http://katalog.we-online.de/em/datasheet/6130xx143121.pdf, Created by="Karrer Zheng", Created Date="29 March 2013", NoPins=02
D1 D2 D3: "Transient Voltage Suppressors for ESD Protection", Package=None, Availability="Not in stock", Check_prices=https://www.snapeda.com/parts/LESD5D5.0CT1G/Leshan+Radio+Co./view-part/?ref=eda, MF="Leshan Radio Co.", MP=LESD5D5.0CT1G, Price=None, SnapEDA_Link=https://www.snapeda.com/parts/LESD5D5.0CT1G/Leshan+Radio+Co./view-part/?ref=snap
D4: "LED; SMD; 0603; red; 50-150mcd; 1.6x0.8mm; 120°; 20mA;", Package="0603 Kingbright", Check_prices=https://www.snapeda.com/parts/KP-1608SURCK/Kingbright/view-part/?ref=eda, MF=Kingbright, MP=KP-1608SURCK, SnapEDA_Link=https://www.snapeda.com/parts/KP-1608SURCK/Kingbright/view-part/?ref=snap
J2: "24 Position FFC, FPC Connector Contacts, Bottom 0.020 (0.50mm) Surface Mount, Right Angle", Package=None, Check_prices=https://www.snapeda.com/parts/5051102491/Molex/view-part/?ref=eda, MF=Molex, MP=5051102491, SnapEDA_Link=https://www.snapeda.com/parts/5051102491/Molex/view-part/?ref=snap
J3 J4: library part XC6222B281MR-G, "Linear Voltage Regulator IC Positive Fixed 1 Output 700mA SOT-25-5", Package="SOT-753 Torex", Check_prices=https://www.snapeda.com/parts/XC6222B281MR-G/Torex/view-part/?ref=eda, MF=Torex, MP=XC6222B281MR-G, SnapEDA_Link=https://www.snapeda.com/parts/XC6222B281MR-G/Torex/view-part/?ref=snap
MK1: "60 Hz ~ 15 kHz Digital, I2S Microphone MEMS (Silicon) 1.62 V ~ 3.63 V Omnidirectional (-26dB ±3dB @ 94dB SPL) Solder Pads", Package="LGA-9 TDK InvenSense", Check_prices=https://www.snapeda.com/parts/INMP441ACEZ-R7/TDK/view-part/?ref=eda, MF="TDK InvenSense", MP=INMP441ACEZ-R7, SnapEDA_Link=https://www.snapeda.com/parts/INMP441ACEZ-R7/TDK/view-part/?ref=snap
R1 R2 R3 R4 R5 R6 R7 R8 R9 R10 R11 R12 R13 R14 R15 R16 R17 R18 R19 R20 R21 R22 R23 R24 R25 R26 R27 R28 R29 R30 R31 R32 R33 R34 R35 R36 R37: library part RES_0402, "Resistor SMD chip 1k Ohm 0.063W 5% 0402", Manufacturer 1=Yageo, Manufacturer 2="Vishay Dale", Manufacturer 3="Samsung Electro-Mechanics America, Inc", Manufacturer 4="Rohm Semiconductor", Manufacturer 5="Panasonic Electronic Components", Manufacturer Part Number 1=RC0402JR-071KL, Manufacturer Part Number 2=CRCW04021K00JNED, Manufacturer Part Number 3=RC1005J102CS, Manufacturer Part Number 4=MCR01MRTJ102, Manufacturer Part Number 5=ERJ-2GEJ102X, Package / Case="0402 (1005 Metric)", Ratings="1/16 W", Supplier Part Number 1=311-1.0KJRCT-ND, Tolerance=±5%, ComponentLink1Description=http://www.yageo.com/documents/recent/PYu-RC0402_51_RoHS_L_6.pdf, ComponentLink1URL=http://www.yageo.com/documents/recent/PYu-RC0402_51_RoHS_L_6.pdf, ComponentLink2Description=http://www.vishay.com/doc?20035, ComponentLink2URL=http://www.vishay.com/doc?20035, ComponentLink3Description=http://www.samsungsem.com/servlet/FileDownload?filename=productcatalog/pdf/Chip_Resistor.pdf, ComponentLink3URL=http://www.samsungsem.com/servlet/FileDownload?filename=productcatalog/pdf/Chip_Resistor.pdf, ComponentLink4Description=http://rohmfs.rohm.com/en/products/databook/datasheet/passive/resistor/chip_resistor/mcr_g.pdf, ComponentLink4URL=http://rohmfs.rohm.com/en/products/databook/datasheet/passive/resistor/chip_resistor/mcr_g.pdf, ComponentLink5Description=http://industrial.panasonic.com/www-cgi/jvcr13pz.cgi?E+PZ+3+AOA0001+ERJ2GEJ102X+7+WW, ComponentLink5URL=http://industrial.panasonic.com/www-cgi/jvcr13pz.cgi?E+PZ+3+AOA0001+ERJ2GEJ102X+7+WW, RoHS 1="RoHS Compliant", RoHS 2="RoHS Compliant", RoHS 3="RoHS Compliant", RoHS 4="RoHS Compliant", RoHS 5="RoHS Compliant", SCDType=spec, Supplier 1=Digi-Key, Supplier 2=Digi-Key, Supplier 3=Digi-Key, Supplier 4=Digi-Key, Supplier 5=Digi-Key, Supplier Part Number 2=541-1.0KJCT-ND, Supplier Part Number 3=1276-4376-1-ND, Supplier Part Number 4=RHM1.0KCECT-ND, Supplier Part Number 5=P1.0KJCT-ND
STA.TR1 STA.TR2: library part C1815, "NPN 600mW, ECB", =C2383
SW1 SW2: library part SW2, "Switch button 2 pin"
U: "0.96” 128 X 64 MONOCHROME GRAPHIC OLED DISPLAY MODULE - I2C", Package=Package, Check_prices=https://www.snapeda.com/parts/DM-OLED096-636/Display+Module/view-part/?ref=eda, MF="Display Module", MP=DM-OLED096-636, SnapEDA_Link=https://www.snapeda.com/parts/DM-OLED096-636/Display+Module/view-part/?ref=snap
U1: "Sot223/Pkg 1-Amp 3.3-Volt Low Drop Out Voltage Regulatator", Package="SOT-223 Seeed Technology", Check_prices=https://www.snapeda.com/parts/AMS1117-3.3/Advanced+Monolithic+Systems/view-part/?ref=eda, MF="Advanced Monolithic Systems", MP=AMS1117-3.3, SnapEDA_Link=https://www.snapeda.com/parts/AMS1117-3.3/Advanced+Monolithic+Systems/view-part/?ref=snap
U3: "Tiny, Low-Cost, PCM Class D Amplifier with Class AB Performance", Package="TQFN-16 Maxim", Check_prices=https://www.snapeda.com/parts/MAX98357AETE+T/Analog+Devices/view-part/?ref=eda, MF="Analog Devices", MP=MAX98357AETE+T, SnapEDA_Link=https://www.snapeda.com/parts/MAX98357AETE+T/Analog+Devices/view-part/?ref=snap
USB: "USB-C (USB TYPE-C) USB 4.0 Receptacle Connector 24 Position Board Edge, Cutout; Surface Mount; Through Hole, Right Angle", Package=None, Check_prices=https://www.snapeda.com/parts/2388749-1/TE+Connectivity/view-part/?ref=eda, MF="TE Connectivity", MP=2388749-1, SnapEDA_Link=https://www.snapeda.com/parts/2388749-1/TE+Connectivity/view-part/?ref=snap
X1: "Bluetooth, WiFi 802.11b/g/n, Bluetooth v5.0 Transceiver Module 2.4GHz PCB Trace Surface Mount", Package="NON STANDARD Espressif Systems", Check_prices=https://www.snapeda.com/parts/ESP32-S3-WROOM-1-N16R8/Espressif+Systems/view-part/?ref=eda, MF="Espressif Systems", MP=ESP32-S3-WROOM-1-N16R8, SnapEDA_Link=https://www.snapeda.com/parts/ESP32-S3-WROOM-1-N16R8/Espressif+Systems/view-part/?ref=snap

## Via types
v1: diameter 20, hole 12, Top Layer to Bottom Layer, tented both sides, 144 vias
v2: diameter 18, hole 12, Top Layer to Bottom Layer, tented both sides, 39 vias
v3: diameter 30, hole 15, Top Layer to Bottom Layer, tented both sides, 1 vias

## Nets (pads, with @x,y where several pads share a name; then routed paths per layer and width w, separated by ;. In a path a pad name is that pad's centre, name@x,y a point inside that pad or via, vN(x,y) a via of type N, cw(c..) or ccw(c..) an arc to the next point about the centre after c; other vN are vias at no path point)
+1.5: C19.2 C20.2 J4.P$4 R26.2 | length 1002.4
  Top Layer w10: R26.2 585,837 593,829 763,829 798,794 798,479 750,431 750,390 780,360 780,249 774.31,243.32 C20.2 C19.2 697,217 691.69,211.69 J4.P$4 J4.P$4@635.68,212
+2.8: C11.2 C12.2 J3.P$4 R25.2 | length 833.8
  Top Layer w10: J3.P$4 430.69,211.69 435,216 C12.2 C11.2 513.31,243.32 523,253 v1@523,353
  Bottom Layer w10: v1(522,351) 522,379 413,488 413,642 531,760 v1(586,760)
+3.3V: C2.2 C3.2 C4.2 C9.2 C10.2 C15.2 C16.2 C17.2 C18.2 C26.1 C27.1 J2.11 J3.P$1 J3.P$3 J4.P$1 J4.P$3 MK1.7 MK1.8 R19.1 R20.1 R22.1 R23.2 R24.2 R27.1 R28.2 R32.1 R33.2 U1.2 X1.2 | length 6097.4
  Top Layer w8: 284,126 267,143 267,348 279,360 305.57,360 C16.2 ; 439.31,387.32 441,389 ; J2.11 J2.11@1231,1177.11 ; X1.2@1492,931.49 X1.2
  Top Layer w10: 184.5,466.5 325.5,466.5 337,478 337,520 326.28,530.72 MK1.8 MK1.7 ; 284,126 v2(450,126) ; J3.P$1 380.37,270.37 372,262 318.13,262 305.57,274.57 J3.P$3 305.57,360 305.57,387.57 314,396 368,396 406,358 C15.2 ; J4.P$3@560.31,306.43 J4.P$3 560.57,275.43 570,266 626,266 635.37,275.37 J4.P$1 ; v1@1243,1282 1243,1269 1251,1261 1395,1261 1411,1245 1538,1245 1559,1224 1559,1065.32 R23.2 R24.2 R19.1
  Top Layer w15: v1(350,814) R27.1 R28.2 ; C15.2 439.31,387.32 ; 441,389 685,389 698.31,375.68 C17.2 ; v2(450,126) 450,16 458,8 767,8 780,21 780,102 796,118 v1(808,118) ; J4.P$3@560.31,306.43 C18.2 560.31,387 ; v1(789,1264) 809,1264 838,1235 v1(868,1235) ; 867,1163 895,1135 1001,1135 1007,1129 v1(1024,1129) ; J2.11@1231,1177.11 v1(1231,1212)
  Top Layer w16: 867,1163 v1@867,1181
  Top Layer w20: U1.2 140.63,290.47 C9.2 v3(140.63,405) 140.63,422.63 184.5,466.5 193.31,475.32 C27.1 C26.1 193.31,655.32 233.68,695.68 R32.1 R33.2
  Bottom Layer w8: v2(450,126) v2@452,128 ; R22.1@833.31,118 R22.1
  Bottom Layer w15: v3(140.63,405) 140.63,183.63 198.26,126 v2(450,126) ; v1(234,768) 234,802 247,815 v1@342,815 ; v1(350,814) 377,841 542,841 580,879 580,1138 563,1155 563,1279 582,1298 767,1298 789,1276 v1(789,1264) ; v2@452,128 R20.1 ; v1(808,118) R22.1@833.31,118 ; v1(868,1180) 868,1224 ; v1(1024,1129) 1024,1183 1053,1212 v1(1231,1212) 1231,1237 1243.32,1249.32 C4.2
  Bottom Layer w20: v1(1486.94,1040.55) 1495.94,1031.55 v1(1495.94,928.55) ; v1@1495.94,927.55 1495.94,807.38 C2.2
  other v1: 1243,1284
DGND: C13.1 C14.1 C21.1 C22.1 J2.2 J2.15 R18.1 R21.1 | length 2080.6
  Top Layer w8: C21.1 C22.1 ; C13.1 v2(680,761.32) ; J2.15 1152.15,1278.15 v1@1166,1292 ; v1@1170,1290 1190,1310 1321,1310 v1(1347,1284) ; R18.1 1388,1010.49 v1(1388.94,1009.55) ; J2.2 1408.06,1206.06 1416,1214 1475,1214 1479,1210 v1(1479,1201)
  Bottom Layer w8: v2(680,761.32) v2(680,855) 680,868 649,899 649,1098 701,1150 800,1150 818,1168 818,1290 842.58,1314.58 1143.42,1314.58 1166,1292 v1(1168,1292) ; v1(1388.94,1009.55) 1388.94,1058.94 1479,1149 v1(1479,1201) 1479,1242 1468,1253 1356,1253 1347,1262 v1(1347,1284) R21.1 R21.1@1390.32,1272.68
GND: C1.5 C2.1 C3.1 C4.1 C5.1 C6.1 C7.1 C8.1 C9.1 C10.1 C11.1 C12.1 C15.1 C16.1 C17.1 C18.1 C19.1 C20.1 C23.1 C23.8 C24.1 C26.2 C27.2 C28.2 C29.1 C30.1 C31.1 D1.1 D2.2 D3.1 D4.2 J2.P1 J2.P2 J3.P$2 J4.P$2 MK1.4 MK1.5 MK1.6 MK1.9 R1.1 R2.1 R21.2 R29.2 SW1.2 SW2.2 U1.1 U3.3 U3.11 U3.15 U3.17 U.1 USB.A1 USB.A12 USB.B1 USB.B12 USB.S1 USB.S2 USB.S3 USB.S4 X1.1 X1.40 X1.41 X1.42 X1.43 X1.44 X1.45 X1.46 X1.47 X1.48 X1.49 | length 10620.1
  Top Layer w8: v1(-7,723) -7,663 v1@-6,662 ; U1.1 230.31,103.68 259,75 SW1.2 ; D2.2 292.98,846.02 314,825 314,806 328,792 382,792 408,818 491,818 505,832 v2@505,899 ; MK1.4 440.61,613.39 454,600 454,476 467.37,462.63 R29.2 ; v1(516,528) 534,546 v1(534,612) 534.65,612.65 U3.3 613,612.65 U3.17 632.68,632.34 U3.11 ; U3.15 613,632.34 U3.17@617.37,627.97 ; R2.1 664,981 675,970 693,970 D4.2 ; R1.1 674,1031 709,1066 709,1085 729,1105 C29.1 ; C31.1 C30.1@657.63,505.31 ; SW2.2 718.2,185.2 726,193 809,193 822,206 v1(822,242) ; J2.P2 950.3,1283.3 965,1298 1115,1298 v1@1121,1292 ; X1.42 1545.06,642.12 1545.94,643 ; v1(1538,744) v1@1539,744
  Top Layer w10: USB.S4 166.12,1266.88 182.94,1250.06 USB.B1 182.94,1040.94 173.1,1031.1 USB.A12 173.1,963.1 162,952 144,952 135,943 135,860 148.98,846.02 D1.1 D2.2 ; C27.2 C26.2 ; C26.2@233.29,613.39 MK1.6 319.15,613.39 343.52,589.02 364.04,589.02 388.41,613.39 MK1.4 ; C27.2@239.94,489.38 MK1.9 ; J3.P$2 342.97,357.28 C16.1 372,360 393,339 422,339 435,326 C12.1 C11.1 478.68,287 C15.1 ; C24.1 449,898.48 449,978 429.8,997.2 USB.A1 389.63,1034.63 399.48,1044.48 USB.B12 399.48,1122.48 420,1143 485.07,1143 487.07,1141 ; USB.S1 600.98,1083.02 623.68,1060.32 R1.1 R2.1 ; USB.S1@487.07,1101 491.07,1105 C28.2 585.31,1282.32 603,1300 867.73,1300 J2.P2 ; J4.P$2 599.68,307.9 599.68,342 ; C18.1 599.68,342 ; C31.1 657.63,438.37 669,427 714,427 732,409 732,366.68 C17.1 ; C20.1@744,283 C20.1 C19.1 697,318 673,342 599.68,342 ; X1.48 X1.41 ; v1@1539,744 1539,713 1545.94,706.06 1545.94,643 X1.40 ; X1.47 X1.49 X1.42 X1.43 X1.45 X1.46 X1.47
  Top Layer w20: C8.1 C7.1 25.31,526.68 ; C10.1 C9.1 227,355 230.31,351.68 U1.1
  Top Layer w30: C23.8 C23.1 U.1@70.24,530 ; USB.S4 57.94,1174.06 85.5,1146.5 USB.S2 ; USB.S1 487.07,1101 487.07,1141 487.07,1164.07 514.63,1191.63 USB.S3 ; C1.5 1512,159 1545.94,192.94 X1.40
  Bottom Layer w8: C23.1 -25,530 -8,547 v1(-8,663) ; v1(-7,723) -7,949 85.5,1041.5 USB.S2 ; U.1@72.24,528 219,528 232.29,541.29 v1(232.29,613.39) ; v1@233,357 v1(233,489) ; v1(234,357) 234,320 248,306 v1(344,306) ; v2(451,897) 501,897 v2(504,900) ; v1(478,358) 478,328 488,318 592,318 599.31,325.32 v1(599.31,360) ; v1(516,528) 510,522 510,477 524,463 v1@552,463 ; v1(553,463) v1@552,463 ; v1(657,507) 657,521 647,531 570,531 552,513 v1@552,463 ; v1@745,284 800,284 822,262 v1(822,242) ; v1(1124,1290) 1146,1268 1183,1268 1228.27,1313.27 1282.69,1313.27 ; v1@1536.69,745.32 v1(1538,744)
  Bottom Layer w10: v1(370,73) 370,45 384,31 C5.1 ; v1(718,74) 718,39 730,27 C6.1 ; C4.1 1282.69,1313.27 1283,1313.58 1423.42,1313.58 1429.69,1307.32 R21.2 ; C1.5 C1.5@1517,119 ; v1@1536.69,745.32 C2.1
  Bottom Layer w20: R21.2 v1(1523,1284) 1531,1284 1544.94,1270.06 v1(1544.94,928.55) 1544.94,884.94 1536.69,876.68 C3.1 C2.1
  other v1: 231,24 814,25 357,27 33,41 1076,60 1046,74 581,75 581,122 687,123 32,146 1045,151 947,153 214,162 342,165 1189,185 179,203 32,215 598,239 743,283 187,291 96,305 459,321 683,321.32 -33,443.17 1339,471 516,475 1541,543 233,549 1541,607 1489,611 1478,673 1541,675 1478,734 -130,778.17 -133,867.17 -31,932.17 7,989.17 1537,992 33,1091.17 203,1125 203,1160 41,1165.17 450.32,1186.17 520.32,1187.17 203,1202 116,1296.17 173,1296.17 274,1296.17 359,1296.17 456.32,1296.17
  other v2: 1499,40 1414,52 1513,180 1491,310 1533,310 625.84,620.5 167,963
NetC1_1: C1.1 R37.2 X1.37 | length 1682.9
  Top Layer w6: R37.2 536.31,761.68 569,729 v1@775,729 ; C1.1 1112,78 1126,64 1358,64 1364,70 1364,150 1395.94,181.94 v1(1396,237)
  Bottom Layer w6: v1(777,729) 790,729 793,726 793,632 1106,319 1272,319 1354,237 v1(1396,237)
NetC1_2: C1.2 R36.2 X1.36 | length 1614.5
  Top Layer w6: C1.2 1212,167 1228,183 1330,183 1345.94,198.94 X1.36
  Top Layer w8: R36.2 303,688 326,665 446,665 455,656 v1(455,637) ; v1(942,299) 1319,299 1345.94,272.06 X1.36
  Bottom Layer w8: v1(455,637) 455,491 559,387 691,387 779,299 v1(942,299)
NetC1_3: C1.3 R8.2 STA.TR2.1 | length 1095.7
  Top Layer w8: v1(1086,396) 1086,488 1102,504 1304,504 ; v2(1349,319) 1329,319 1328.5,318.5 1304,343 1304,504 ; v1(1400,504) 1304,504
  Bottom Layer w8: C1.3 1312,144 1343,175 1403,175 1422,194 1422,279 1380,321 v2@1349,321 ; v1(1400,504) 1458,504 1480.4,481.6 STA.TR2.1
NetC1_4: C1.4
NetC5_2: C5.2 R16.1 R20.2 SW1.1 X1.27 | length 1649.3
  Top Layer w8: SW1.1 647.8,38.2 657,29 755,29 763,37 763,157 774,168 888,168 895.94,175.94 X1.27 895.94,357.94 1087,549 v1(1413,549)
  Bottom Layer w8: v1(1413,549) 1480,549 1535,494 R16.1
  Bottom Layer w10: R20.2 C5.2 634,31 648,45 v1(648,73)
NetC6_2: C6.2 R5.1 R14.2 R22.2 STA.TR1.1 SW2.1 X1.3 | length 1949.4
  Bottom Layer w6: R22.2 981,120 996,105 v1(996,75) 996,34 1007,23 1429,23 1462,56 1462,270 1381,351 1325,351 1306,370 1306,432 1303.32,434.68 R5.1 STA.TR1.1@1216.92,434.68 ; 1310.69,394.32 R14.2
  Bottom Layer w8: R5.1 1269,485 1446.94,662.94 v1(1446.94,928.55)
  Bottom Layer w10: C6.2 R22.2 ; STA.TR1.1 STA.TR1.1@1216.92,434.68
NetC13_2: C13.2 C14.2 J2.4 R25.1 | length 1226.6
  Top Layer w8: C14.2 754.31,800.68 v1(775,780)
  Top Layer w10: v1(1308,1239) 1339,1239 1368.69,1209.31 J2.4
  Top Layer w20: R25.1 679,799.68 C14.2
  Bottom Layer w8: v1(775,780) 784,771 821,771 853,803 853,1060 874,1081 1207,1081 1279,1153 1279,1225 1293,1239 v1(1308,1239)
NetC21_2: C21.2 C22.2 J2.10 R26.1 | length 1117.6
  Top Layer w8: C22.2 770.68,894.68 v1@771,895 ; v1(1188,1246) 1237,1246 1250.57,1232.43 J2.10
  Top Layer w20: R26.1 C21.2 C22.2
  Bottom Layer w8: v1(771,894.68) 795.69,894.68 832,931 832,1274 857.58,1299.58 1077.42,1299.58 1131,1246 v1(1188,1246)
NetC23_3: C23.3 R34.1 R36.1 | length 620.4
  Top Layer w8: C23.3 -24,787.22 -24,872 -15,881 83,881 158,806 292,806 303,795 R36.1
  Top Layer w10: R36.1 R34.1
NetC23_6: C23.6 R35.1 R37.1 | length 725.7
  Top Layer w10: R35.1 414,722.32 R37.1@463,722.32
  Bottom Layer w8: C23.6 -134.22,683 120,683 141,662 360,662 420,722 v1(441,722)
NetC25_1: C25.1 C28.1 U3.10 | length 703.6
  Top Layer w10: C25.1 637,1148 624.68,1135.68 C28.1 667,1105 678,1094 v1(678,1077) ; U3.10 705.65,612.65 719,626 v2(719,686)
  Bottom Layer w10: v1(678,1077) 676,1075 676,908 720,864 720,687 v2(719,686)
NetC25_2: C25.2 C29.2 U3.9 | length 713.5
  Top Layer w10: U3.9 724.97,592.97 747,615 v2(747,675) ; C25.2 737,1198 788.69,1146.32 C29.2 788,1104.32 v1(788,1067)
  Bottom Layer w10: v2(747,675) 747,950 788,991 v1(788,1067)
NetD2_1: D2.1 R27.2 USB.A7 USB.B7 X1.13 | length 1133.1
  Top Layer w6: USB.B7 v2@301.05,1110.95
  Top Layer w8: v2(262,958) 271.52,967.52 USB.A7 ; v2(301,1111) v2@301.05,1110.95 ; v2(519.45,959.55) 532,947 799,947 825,973 930,973 945.94,957.06 X1.13
  Top Layer w10: D2.1 348.5,897.98 R27.2
  Bottom Layer w6: v2(301,1111) 301,1027 262,988 v2(262,958) 262,939 279.45,921.55 v2(279.45,898.55) 304.55,898.55 339,933 401,933 414.55,946.55 511.55,946.55
  Bottom Layer w8: 511.55,946.55 v2@520,955
NetD3_2: D3.2 R28.1 USB.A6 USB.B6 X1.14 | length 886
  Top Layer w8: D3.2 234.69,896.98 260.71,923 ; USB.B6 281.37,1044.63 291.21,1034.79 USB.A6 291.21,953.5 260.71,923 ; R28.1@402,903 402,912 391,923 260.71,923 ; v2(514.45,927.55) 515.39,928.5 894.99,928.5 X1.14
  Bottom Layer w8: v2(402,897) 402,910 419.55,927.55 v2(514.45,927.55)
NetD4_1: D4.1 R31.1 | length 734.6
  Top Layer w8: D4.1 799.93,991 957,991 v1(966,982) ; v2(956,713) 956,671 1009,618 v2@1009,511
  Bottom Layer w8: v2@954,711 954,738 971,755 971,977 v1(966,982)
  other v2: 1007,509
NetJ2_3: J2.3 R23.1 X1.5 | length 681.5
  Top Layer w6: J2.3 1388.37,1231 1525,1231 1536,1220 R23.1
  Bottom Layer w6: v1(1346,928.55) 1346,1214 1363,1231 v1@1387,1231
  Bottom Layer w8: v1@1346,926 v1(1346,928.55) ; v1(1387,1230) v1@1387,1231
NetJ2_5: J2.5 R24.1 X1.4 | length 429.7
  Top Layer w6: J2.5 1349,1154 1356,1147 1469,1147 1487,1129 R24.1
  Bottom Layer w6: v1(1395.94,928.55) 1395.94,951.94 1446,1002 1446,1073 1455.55,1082.55 v1(1487.94,1082.55)
NetJ2_6: J2.6 R19.2 | length 183.3
  Top Layer w6: J2.6 1329.32,1149.68 1346,1133 1420,1133 1437,1116 R19.2
NetJ2_7: J2.7 X1.6 | length 316.5
  Top Layer w8: J2.7 1309.63,1205.63 v1(1310,1206)
  Bottom Layer w6: v1@1297,924 1297,987 1310,1000 v1(1310,1206)
  other v1: 1297,928.55
NetJ2_8: J2.8 R18.2 | length 168.7
  Top Layer w6: J2.8 1289.94,1146.06 1316,1120 1372,1120 1388,1104 R18.2
NetJ2_9: J2.9 R17.2 | length 136.3
  Top Layer w6: J2.9 1270.26,1141.74 1308,1104 1330,1104 1338,1096 R17.2
NetJ2_12: J2.12 R15.2 | length 141
  Top Layer w6: J2.12 1211.2,1153.8 1225,1140 1247,1140 1288,1099 R15.2
NetJ2_13: J2.13 R13.2 | length 115.6
  Top Layer w6: J2.13 1191.52,1148.48 1238,1102 R13.2
NetJ2_14: J2.14 R12.2 | length 103.4
  Top Layer w6: J2.14 1171.83,1145.17 1189,1128 R12.2
NetJ2_16: J2.16 R11.2 | length 108.3
  Top Layer w6: J2.16 1132.46,1137.54 1139,1131 R11.2
  Top Layer w8: R11.2@1132.46,1087.22 R11.2
NetJ2_17: J2.17 R10.2 | length 106.2
  Top Layer w6: R10.2 1089,1114 1112.78,1137.78 J2.17
NetJ2_18: J2.18 R9.2 | length 118.7
  Top Layer w6: R9.2 1039,1097 1093.09,1151.09 J2.18
NetJ2_19: J2.19 R7.2 | length 374.3
  Top Layer w8: R7.2 991,1081.68 v1(991,1107) ; v1@1019,1278 v1(1025,1278) 1060,1278 1073.41,1264.59 J2.19
  Bottom Layer w8: v1@991,1110 v1(991,1107) 991,1262 1007,1278 v1(1025,1278)
NetJ2_20: J2.20 R6.2 | length 341.7
  Top Layer w8: R6.2 v1(939,1107) ; v1(964,1257) 1018,1257 1053.72,1221.28 J2.20
  Bottom Layer w8: v1(939,1107) 941,1109 941,1243 955,1257 v1(964,1257)
NetJ2_21: J2.21 R4.2 | length 336.6
  Top Layer w8: R4.2 v1(890,1106) ; v1(914,1234) 1018,1234 1034.04,1217.96 J2.21
  Bottom Layer w8: v1(890,1106) 890,1218 906,1234 v1(914,1234)
NetJ2_22: J2.22 R3.2 | length 329.1
  Top Layer w8: R3.2 841,1201 851,1211 1008,1211 1014.35,1204.65 J2.22
NetMK1_1: MK1.1 X1.31 | length 941.5
  Top Layer w6: MK1.1 406.14,464.86 414,457 v2(414,442)
  Bottom Layer w6: v2(414,442) 414,272 476,210 1024,210 1051,237 v1(1098,237)
NetMK1_2: MK1.2 X1.32 | length 1098.3
  Top Layer w6: v2(376,443) 376,522 384.72,530.72 MK1.2
  Bottom Layer w6: v2(376,443) 391,428 391,262 457,196 1104,196 v1(1145,237)
NetMK1_3: MK1.3 X1.33 | length 1256.6
  Top Layer w6: v2(340,440) 340,453 356,469 356,552 376.06,572.06 MK1.3
  Bottom Layer w6: v2(340,440) 340,376 372,344 372,248 438,182 1144,182 v1(1197,235)
NetR1_2: R1.2 USB.A5 | length 394.3
  Top Layer w8: USB.A5 310.89,948.11 v2(313,946) ; v2(484,1004) 497,1004 524,1031 R1.2
  Bottom Layer w8: v2(313,946) 313,990 339,1016 471,1016 483,1004 v2(484,1004)
NetR2_2: R2.2 USB.B5 | length 539
  Top Layer w8: USB.B5 261.68,1102.68 v2(270,1111) ; v2(541,980) 542,981 R2.2
  Bottom Layer w8: v2(270,1111) 270,1128 291,1149 519,1149 541,1127 v2(541,980)
NetR3_1: R3.1 X1.12 | length 250.2
  Top Layer w8: R3.1 841,1025 852,1014 977,1014 995.94,995.06 X1.12
NetR4_1: R4.1 X1.17 | length 306.5
  Bottom Layer w6: v1(849,759) 863,759 890,786 v1(890,1040.32)
NetR5_2: R5.2 STA.TR1.2 | length 127.5
  Bottom Layer w8: STA.TR1.2 1256.56,351.56 1269,364 R5.2
NetR6_1: R6.1 X1.18 | length 395.2
  Bottom Layer w6: v1(848,708) 891,708 939,756 v1(939,1040.32)
NetR7_1: R7.1 X1.19 | length 499.5
  Bottom Layer w6: v1(846,658) 945,658 989,702 v1(989,1040.32)
NetR8_1: R8.1 STA.TR1.3 | length 54.2
  Bottom Layer w10: R8.1 1088.52,436.2 STA.TR1.3
NetR9_1: R9.1 X1.20 | length 585.1
  Bottom Layer w6: v1(847,609) 972,609 1039,676 v1(1039,1041.32)
NetR10_1: R10.1 X1.21 | length 667.6
  Top Layer w8: X1.21 846.79,558 v1(897,558)
  Bottom Layer w6: v1(897,558) 992,558 1088.94,654.94 v1(1088.94,1040.18)
NetR11_1: R11.1 X1.11 | length 169.3
  Top Layer w6: X1.11 1045.94,961.94 1074,990 1103,990 1139,1026 1139,1033 R11.1
NetR12_1: R12.1 X1.10 | length 176.3
  Top Layer w6: X1.10 1095.94,959.94 1138,1002 1179,1002 1189,1012 R12.1
NetR13_1: R13.1 X1.8 | length 131.2
  Bottom Layer w6: v1(1195.94,927.55) 1195.94,971.94 1238,1014 v1(1238,1041.32)
NetR14_1: R14.1 STA.TR2.3 | length 55.4
  Bottom Layer w10: R14.1 1403.64,433.68 STA.TR2.3
NetR15_1: R15.1 X1.9 | length 239.4
  Top Layer w6: X1.9 1145.94,969.94 1164,988 1278,988 1288,998 R15.1
NetR16_2: R16.2 STA.TR2.2 | length 137.7
  Bottom Layer w10: STA.TR2.2 1444,350 1535,350 R16.2
NetR17_1: R17.1 X1.7 | length 186.3
  Top Layer w6: X1.7 1245.94,958.94 1258,971 1315,971 1338,994 R17.1
NetR29_1: R29.1 U3.2 | length 265.6
  Top Layer w8: R29.1@547.31,507 501,507 489,519 489,625 507,643 529,643 539.66,632.34 U3.2
  Top Layer w10: R29.1@547.31,507 R29.1
NetR30_1: R30.1 U3.4 X1.26 | length 574.4
  Top Layer w8: v2(770,406) 782,406 798,390 798,319 808.94,308.06 X1.26
  Top Layer w10: U3.4 566.35,538.65 574,531 596,531 601,526 601,502.32 R30.1
  Bottom Layer w8: v1@601,502 v1(600,502) 584,502 577,495 577,426 597,406 v2(770,406)
NetR31_2: R31.2 X1.22 | length 123.1
  Top Layer w8: X1.22 848.66,510 v2(969,510)
NetR32_2: R32.2 U.3 X1.16 | length 1289.6
  Top Layer w8: v2(529,873) 529,892 552.5,915.5 788.5,915.5 798,906 798,832 821.94,808.06 X1.16
  Top Layer w10: U.3@72.24,728 83.24,717 R32.2
  Bottom Layer w8: U.3@72.24,728 28,728 20,736 20,874 51,905 137,905 169,873 v2(529,873)
NetR33_1: R33.1 U.4 X1.24 | length 1215.9
  Top Layer w8: v1@349,687 471,687 485,673 v1(485,662)
  Top Layer w10: U.4@72.24,828 105,828 165,768 R33.1
  Bottom Layer w8: U.4@72.24,828 132,828 144,816 144,705 160,689 v1(348,689) ; v1(485,662) 485,566 500,551 667,551 724,494 754,494 v1(841,407)
NetR34_2: R34.2 X1.23 | length 862.7
  Top Layer w8: X1.23 897.06,458.06 v2(906,467)
  Bottom Layer w8: v1(358,723) 358,763 414,819 627,819 635,811 635,738 v2(906,467)
NetR35_2: R35.2 X1.25 | length 1007.5
  Top Layer w8: R35.2 413,791 419,797 v1(504,797) v1@508,797 ; v1(726,547) 728,547 728,465 v2(731,462)
  Bottom Layer w8: v1(504,797) 599,797 611,785 611,740 599,728 534,728 509,703 509,581 518,572 676,572 701,547 v1(726,547) ; v2(731,462) 758,462 814,406 814,390 v1(845,359)
NetU3_1: U3.1 X1.35 | length 982.4
  Top Layer w8: v1(565,671) 565,653.37 U3.1
  Bottom Layer w8: v1(565,671) 564,672 564,695 574,705 634,705 888,451 888,450.54 1037.54,301 1246,301 1296,251 v1(1296,237)
NetU3_14: U3.14
NetU3_16: U3.16 X1.34 | length 1004.5
  Top Layer w8: U3.16 593.31,703.31 603,713 757,713 772,698 772,595 758,581 v2(758,526)
  Bottom Layer w8: v2(758,526) 761,526 1004,283 1215,283 1246,252 v1(1246,240)
VBUS: C24.2 D1.2 USB.A4 USB.A9 USB.B4 USB.B9 | length 886.8
  Top Layer w6: D1.2 164,927 171,934 208,934 232.15,958.15 USB.A9 232.15,1034.15 242,1044 USB.B4 242,1143 252,1153 331,1153 340.42,1143.58 USB.B9 340.42,1045.42 330.58,1035.58 USB.A4 330.58,963.42 340,954 v2(349,954)
  Top Layer w8: C24.2 467.11,857.11 484,874 v2(484,968)
  Bottom Layer w8: v2(349,954) 376,954 390,968 v2(484,968)
VCC: C7.2 C8.2 C23.2 C23.7 C30.2 C31.2 R30.2 U1.3 U3.7 U3.8 U.2 | length 1785.7
  Top Layer w10: U3.7 U3.8 679,566 696.31,548.68 C30.2 696.31,460.68 C31.2
  Top Layer w15: v1@209,435 230,414 594,414 601.31,421.32 R30.2
  Top Layer w20: U1.3 50,322 64.68,336.68 C8.2 C7.2
  Top Layer w30: C23.7 C23.2 U.2@70.24,630 ; C7.2 136,476.32 136,603 111,628 U.2@72.24,628
  Bottom Layer w8: v1(601,463) v1@603,461
  Bottom Layer w15: U.2@72.24,628 32,628 17,613 17,473 38,452 194.68,452 v1(210.06,436.62) ; v1@603,461 v2(697,461)
pads on no net: C2.0 C3.0 C4.0 C5.0 C6.0 C7.0 C8.0 C9.0 C10.0 C11.0 C12.0 C13.0 C14.0 C15.0 C16.0 C17.0 C18.0 C19.0 C20.0 C21.0 C22.0 C23.4 C23.5 C24.0 C26.0 C27.0 C28.0 C29.0 C30.0 C31.0 J2.1 J2.23 J2.24 J3.P$5 J4.P$5 MK1. R1.0 R2.0 R3.0 R4.0 R5.0 R6.0 R7.0 R8.0 R9.0 R10.0 R11.0 R12.0 R13.0 R14.0 R15.0 R16.0 R17.0 R18.0 R19.0 R20.0 R21.0 R22.0 R23.0 R24.0 R25.0 R26.0 R27.0 R28.0 R29.0 R30.0 R31.0 R32.0 R33.0 R34.0 R35.0 R36.0 R37.0 U1.4 U3.5 U3.6 U3.12 U3.13 U.S1 U.S2 U.S3 U.S4 USB. USB.A2 USB.A3 USB.A8 USB.A10 USB.A11 USB.B2 USB.B3 USB.B8 USB.B10 USB.B11 X1.15 X1.28 X1.29 X1.30 X1.38 X1.39

## Polygon pours and split planes (outlines as drawn)
GND on Bottom Layer "Bottom Layer-GND" (solid, remove dead copper, pour order 8): 1574.8,1328.58 0,1328.58 0,1092.36 -196.85,895.51 -236.22,895.51 -236.22,462.44 0,226.22 0,-10 1573.8,-10
GND on Top Layer "Top Layer-GND" (solid, remove dead copper, pour order 6): 1574.8,1328.58 0,1328.58 0,1092.36 -196.85,895.51 -236.22,895.51 -236.22,462.44 0,226.22 0,-10 1574.8,-10

## Keep-outs
Keep-Out Layer:
  lines w10: -1,-10 1573.8,-10 ; 0,-10 0,265.59 ccw(c-196.85,265.59) -196.85,462.44 -236.22,462.44 -236.22,895.51 -196.85,895.51 ccw(c-196.85,1092.36) 0,1092.36 0,1289.21 0,1309.72 0,1328.58 1574.8,1328.58 1574.8,-10

## Silkscreen, mask and mechanical layers (free items; w line width, h text height)
Top Overlay:
  lines w10: -236.22,462.44 -236.22,895.51 117.51,895.51 117.51,462.44 -236.22,462.44
  text "CAM SOCKET" at 1075,1113 h50
  text "USB" at 24,919 h80
  text "ESP32 MODULE" at 751,901 h75 r270
  text "TX" at -145,745 h50 r45
  text "RX" at -44,744 h50 r45
  text "VCC" at 6,585 h50 r90
  text "MIC" at 493,511 h80 r90
  text "GND" at 6,473 h50 r90
  text "RESET" at 744,173 h50
  text "BOOT" at 403,166 h50
  text "TX" at 1080,159 h50
  text "RX" at 1184,158 h50
  text "DTR" at 1264,158 h50
  text "RTS" at 1369,158 h50
  text "GND" at 1462,158 h50
Bottom Overlay:
  drawing of 3 lines, arcs and shapes, not listed
  text "EIU FABLAB" at 148,383 h120

## Text inside footprints (layer, text, board x,y; h text height)
USB: Mechanical 13 "PCB EDGE" at 10.7,1323.97 h32 r180